# Altium PCB I2C_Shield.PcbDoc (part 2 of 2)
Units mm, origin at the board's own origin, x right, y up, seen from the top; angles counter-clockwise.
Board outline 57.58 x 53.85 mm, 2 copper layers (Top Layer, Bottom Layer); 35 components, 41 nets, 124 pads, 57 vias.
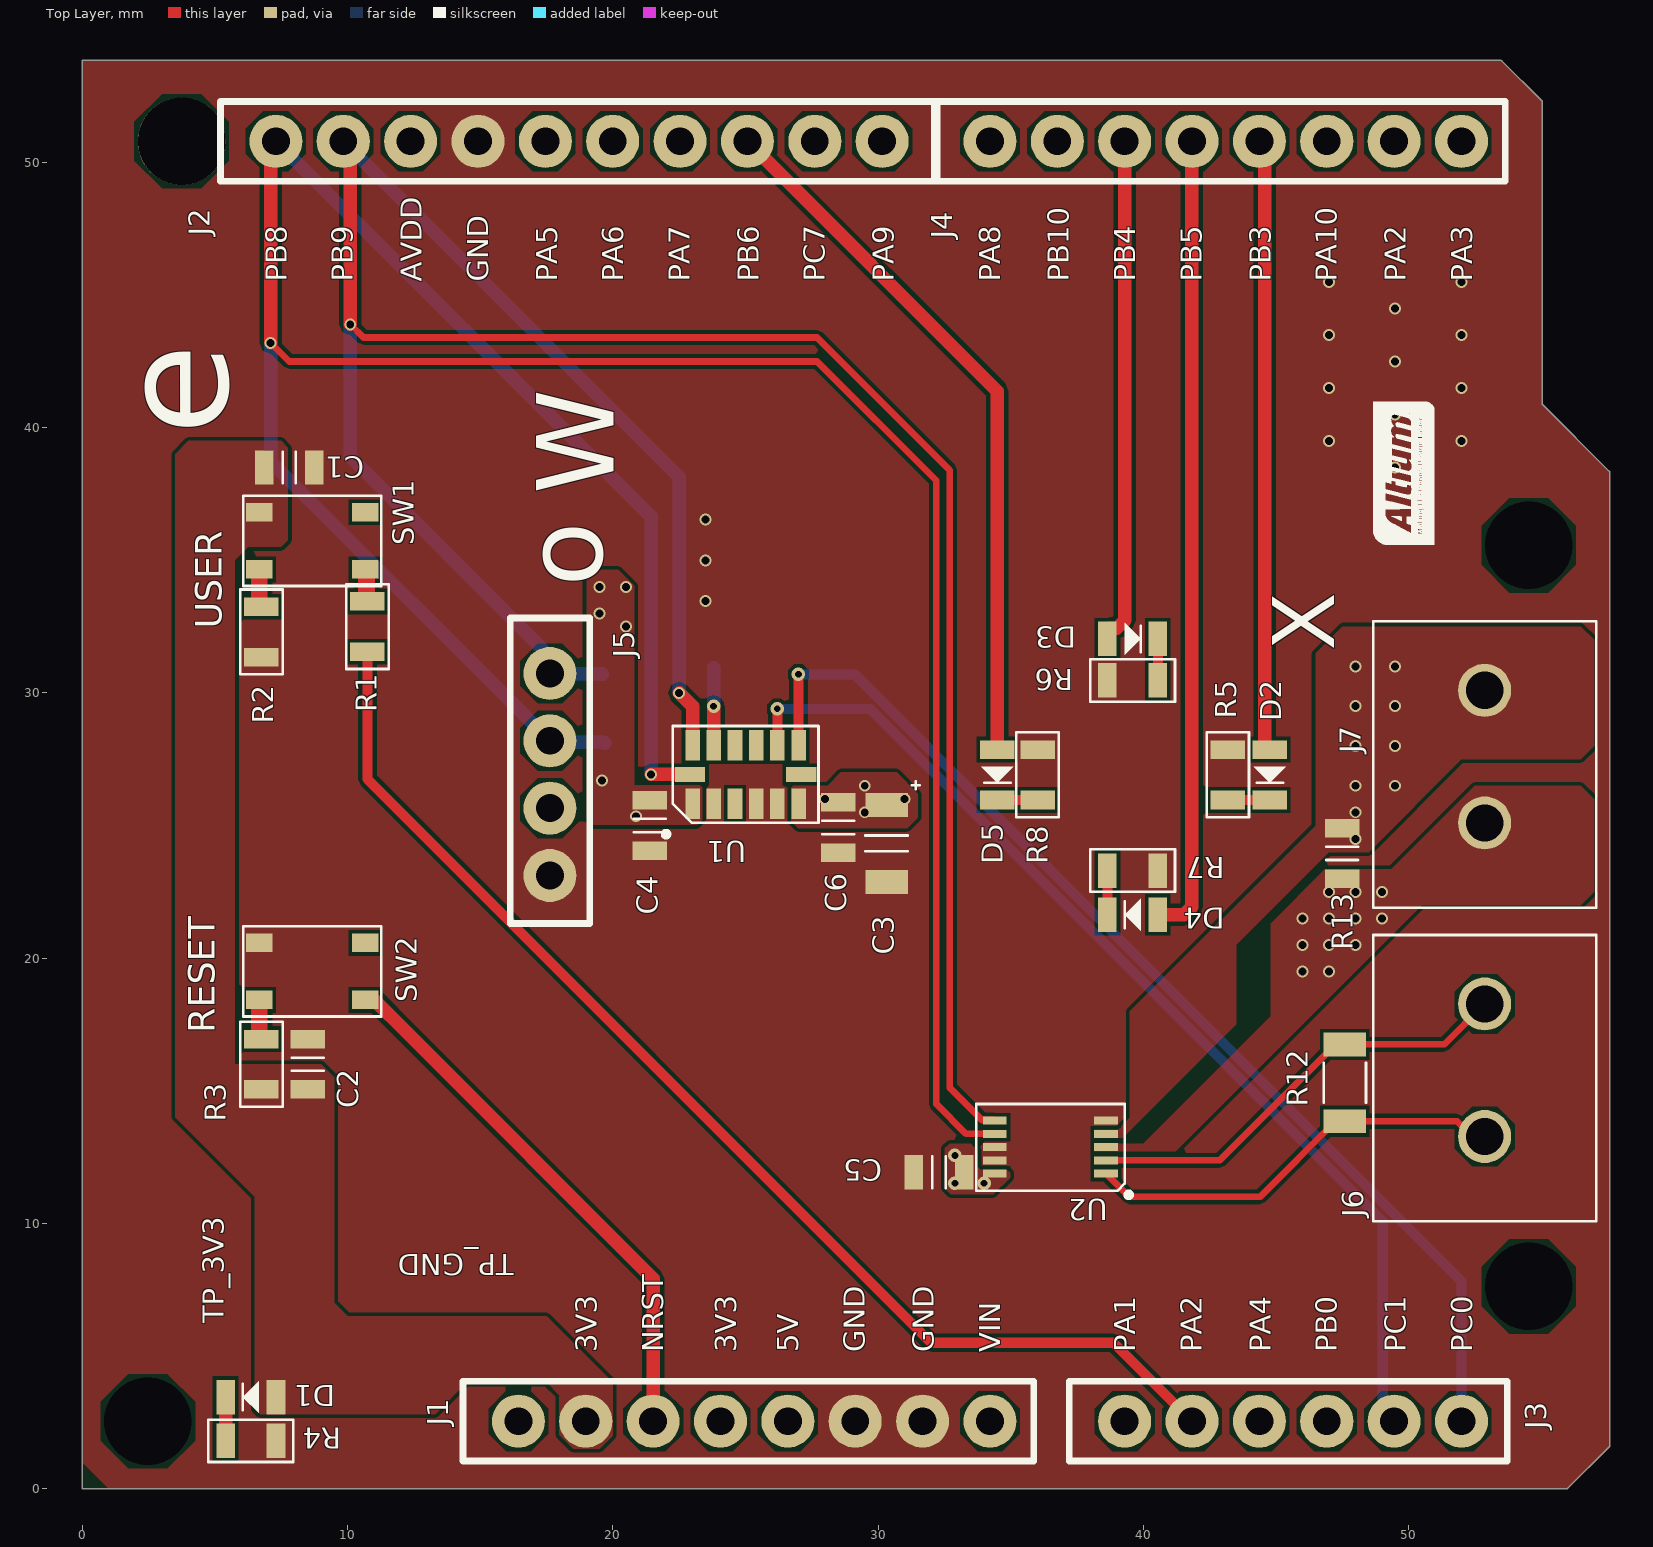
[diagram p0: Top Layer view]

## Via types
v1: diameter 0.45, hole 0.3, Top Layer to Bottom Layer, tented both sides, 51 vias
v2: diameter 0.508, hole 0.254, Top Layer to Bottom Layer, tented both sides, 6 vias

## Nets (pads, with @x,y where several pads share a name; then routed paths per layer and width w, separated by ;. In a path a pad name is that pad's centre, name@x,y a point inside that pad or via, vN(x,y) a via of type N, cw(c..) or ccw(c..) an arc to the next point about the centre after c; other vN are vias at no path point) (continued)
PB9/SDA: (continued)
  Top Layer w0.508: J2.2 10.1,50.536 v1(10.1,43.9) ; v1(22.5,30) 23.007,29.492 U1.13
  Bottom Layer w0.508: J2.2 22.5,38.136 v1(22.5,30) ; v1(10.1,43.9) 10.1,38.9 17.342,31.658 17.342,31.021 17.645,30.718 19.582,30.718 R9.1
PB10: J4.2
PC0: J3.6 U1.8 | length 42.4
  Top Layer w0.381: v2(27,30.7) 27.004,30.696 27.004,28.027 U1.8
  Bottom Layer w0.381: v2(27,30.7) 29.118,30.7 43.818,16 52,7.818 J3.6
PC1: J3.5 U1.9 | length 39.9
  Top Layer w0.381: v2(26.2,29.4) 26.204,29.396 26.204,28.027 U1.9
  Bottom Layer w0.381: v2(26.2,29.4) 29.7,29.4 49.029,10.07 49.029,3.408 49.46,2.978 J3.5
PC7: J2.9
V1: J6.2 R12.2 U2.1 | length 16.1
  Top Layer w0.254: U2.1 39.475,11 44.4,11 47.25,13.85 R12.2 51.827,13.85 52.402,13.275 J6.2
V2: J6.1 R12.1 U2.2 | length 16.7
  Top Layer w0.254: U2.2 42.875,12.375 47.25,16.75 R12.1 51.35,16.75 J6.1
V3: J7.2 R13.2 U2.3
  other v1: 46,19.5 47,19.5 46,20.5 47,20.5 48,20.5 46,21.5 47,21.5 48,21.5 49,21.5 47,22.5 48,22.5 49,22.5
V4: J7.1 R13.1 U2.4
  other v1: 48,24.5 48,25.5 48,26.5 49.5,26.5 48,28 49.5,28 48,29.5 49.5,29.5 48,31 49.5,31
VIN: J1.8
pads on no net: J1.1 SW1. SW2. U1.3 U1.7 U1.10 U1.11

## Polygon pours and split planes (outlines as drawn)
GND on Top Layer "GND_L01_P022" (solid, remove dead copper, pour order 22): 1,0 52.481,0 55.999,0 57.58,1.578 57.585,5.104 57.577,5.111 57.577,38.355 55.046,40.886 55.046,52.312 53.508,53.851 0,53.851 0,1
V4 on Top Layer "V4_L01_P004" (solid, pour order 4): 57,32 56.5,32.5 47.5,32.5 46.5,31.5 46.5,25 39.5,18 39.5,13.978 39.05,13.528 38.15,13.528 38.15,13.223 39.222,13.223 43.5,17.5 43.5,20.5 47,24 48.5,24 52,27.5 56.5,27.5 57,28
3V3 on Top Layer "3V3_L01_P019" (solid, pour order 19): 30.7,27 31.5,26.2 31.5,25.3 31.1,24.9 27,24.9 26.732,25.167 26.732,26.433 26.8,26.5 28.1,26.5 28.6,27
3V3 on Top Layer "3V3_L01_P017" (solid, pour order 17): 19.236,34.637 20.209,34.637 20.8,34.046 20.8,26.5 20.8,25.025 19.275,25.025 19.009,25.291 19.009,34.409
3V3 on Top Layer "3V3_L01_P014" (solid, pour order 14): 23.275,26.525 23.375,26.425 23.375,25.225 23.175,25.025 20.75,25.025 20.575,25.2 20.575,26.4 20.7,26.525
3V3 on Top Layer "3V3_L01_P013" (solid, pour order 13): 32.7,13 33.5,13 33.75,12.75 33.75,12.129 33.851,12.028 34.85,12.027 34.977,11.9 34.977,11.728 34.35,11.1 32.75,11.1 32.525,11.325 32.525,12.825
3V3 on Top Layer "3V3_L01_P008" (solid, pour order 8): 7.75,35.75 7.75,39.25 7.5,39.5 4,39.5 3.5,39 3.5,14 6.5,11 6.5,3 6.7,2.8 13.3,2.8 14.5,4 17.5,4 18,3.5 17.98,3.48 17.98,2.02 18.5,1.5 19.5,1.5 20,2 20,4 17.5,6.5 10,6.5 9.5,7 9.5,15.25 9.5,15.5 9,16 5.75,16 5.75,33.25 5.75,35 6.257,35.507 7.507,35.507
V3 on Top Layer "V3_L01_P005" (solid, pour order 5): 56.5,26.5 57,26 57,22.5 56.5,22 50.5,22 41.222,12.723 38.15,12.723 38.15,13.028 39.05,13.028 39.077,13 40,13 44.8,17.8 44.8,21.3 46.85,23.35 49.35,23.35 52.5,26.5
3V3 on Top Layer "3V3_L01_P000" (solid, pour order 0): 4.05,37.5 4.35,37.8 7.35,37.8 7.65,37.5 7.65,36.2 7.35,35.9 4.25,35.9 4.05,36.1
GND on Bottom Layer "GND_L02_P025" (solid, remove dead copper, pour order 25): 1.5,0 56,0 57.585,1.585 57.585,5.704 57.585,38.347 55.046,40.886 55.046,52.312 53.508,53.851 1.258,53.851 0,52.593 0,1.5
3V3 on Bottom Layer "3V3_L02_P011" (solid, pour order 11): 18.8,4.64 17.75,3.5 17.75,1.75 18.25,1.25 19.75,1.25 20.25,1.75 20.25,3.75 20.75,4.25 22.75,4.25 23,4 23,1.75 23.5,1.25 25,1.25 25.25,1.5 25.25,21.826 19.776,27.3 18.8,27.3 18.25,26.75 16.75,26.75 16.25,26.25 16.25,24.75 16.5,24.5 18.706,24.5
V3 on Bottom Layer "V3_L02_P024" (solid, pour order 24): 56.5,26.5 57,26 57,22.5 56.5,22 50.5,22 46.583,18.083 45.417,18.083 44.8,18.7 44.8,21.3 46.85,23.35 49.35,23.35 52.5,26.5
V4 on Bottom Layer "V4_L02_P023" (solid, pour order 23): 57,32 56.5,32.5 47.5,32.5 46.5,31.5 46.5,25 47,24 46.914,24 47,24 48.5,24 52,27.5 56.5,27.5 57,28
3V3 on Bottom Layer "3V3_L02_P020" (solid, pour order 20): 27,25.7 28.4,27.1 31,27.1 31.6,26.5 31.6,25.1 25.132,18.632 25,21.8 21.3,25.5 21.3,25.7
3V3 on Bottom Layer "3V3_L02_P015" (solid, pour order 15): 19,34.4 19.3,34.7 20.187,34.7 20.5,34.387 20.5,31.962 20.325,31.788 19.125,31.788 19,31.912
3V3 on Bottom Layer "3V3_L02_P012" (solid, pour order 12): 25,14.5 26.5,13 33.5,13 34,12.5 34,12.25 34.75,12.25 35,12 35,11.75 34.75,11.5 34,11.5 33.5,11 25.5,11 25,10.5

## Silkscreen, mask and mechanical layers (free items; w line width, h text height)
Top Overlay:
  drawing of 1840 lines, arcs and shapes, not listed
  text "PB8" at 7.7,45.5 h0.8 r90
  text "PB9" at 10.2,45.5 h0.8 r90
  text "AVDD" at 12.8,45.5 h0.8 r90
  text "GND" at 15.3,45.5 h0.8 r90
  text "PA5" at 17.9,45.5 h0.8 r90
  text "PA6" at 20.4,45.5 h0.8 r90
  text "PA7" at 22.9,45.5 h0.8 r90
  text "PB6" at 25.5,45.5 h0.8 r90
  text "PC7" at 28,45.5 h0.8 r90
  text "PA9" at 30.6,45.5 h0.8 r90
  text "PA8" at 34.6,45.5 h0.8 r90
  text "PB10" at 37.2,45.5 h0.8 r90
  text "PB4" at 39.7,45.5 h0.8 r90
  text "PB5" at 42.2,45.5 h0.8 r90
  text "PB3" at 44.8,45.5 h0.8 r90
  text "PA10" at 47.3,45.5 h0.8 r90
  text "PA2" at 49.9,45.5 h0.8 r90
  text "PA3" at 52.4,45.5 h0.8 r90
  text "e" at 6.819,39.718 h7 r90
  text "W" at 21,37.5 h5 r90
  text "o" at 20.555,34 h5 r90
  text "USER" at 5.25,32.417 h1 r90
  text "X" at 47.978,31.581 h4 r90
  text "RESET" at 5,17.167 h1 r90
  text "TP_GND" at 16.266,8.833 h0.8 r180
  text "TP_3V3" at 5.333,6.234 h0.8 r90
  text "3V3" at 19.4,5.134 h0.8 r90
  text "NRST" at 21.9,5.134 h0.8 r90
  text "3V3" at 24.65,5.134 h0.8 r90
  text "5V" at 27,5.134 h0.8 r90
  text "GND" at 29.5,5.134 h0.8 r90
  text "GND" at 32.1,5.134 h0.8 r90
  text "VIN" at 34.6,5.134 h0.8 r90
  text "PA1" at 39.7,5.134 h0.8 r90
  text "PA2" at 42.2,5.134 h0.8 r90
  text "PA4" at 44.8,5.134 h0.8 r90
  text "PB0" at 47.3,5.134 h0.8 r90
  text "PC1" at 49.9,5.134 h0.8 r90
  text "PC0" at 52.4,5.134 h0.8 r90
Bottom Overlay:
  text "W" at 18.75,2.75 h7 r90
Top Solder:
  circle w1: c8,9.5 r0.4
  circle w1: c13.5,10.5 r0.4
Drill Drawing:
  lines w0.1: 53.515,53.843 53.508,53.851 ; 53.508,53.851 55.046,52.312 55.046,40.886 57.581,38.351 57.581,1.58 56.001,0 0,0 0,53.851 53.508,53.851